# EAGLE board power_v1 (EAGLE 7.4.0)
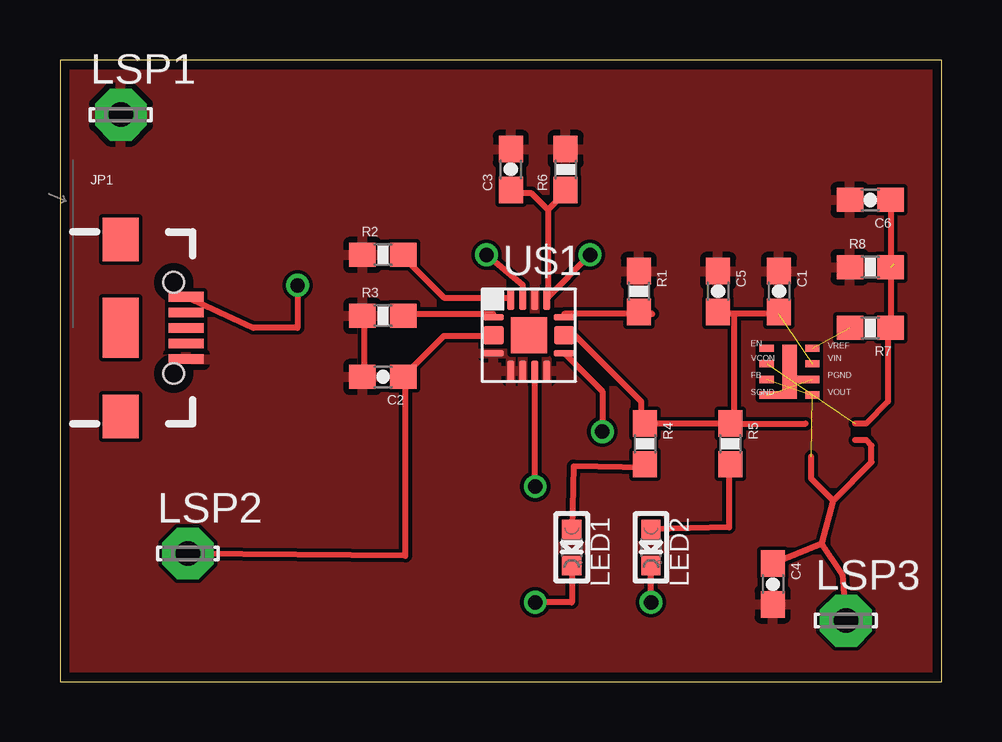
[diagram p0: board, top side]
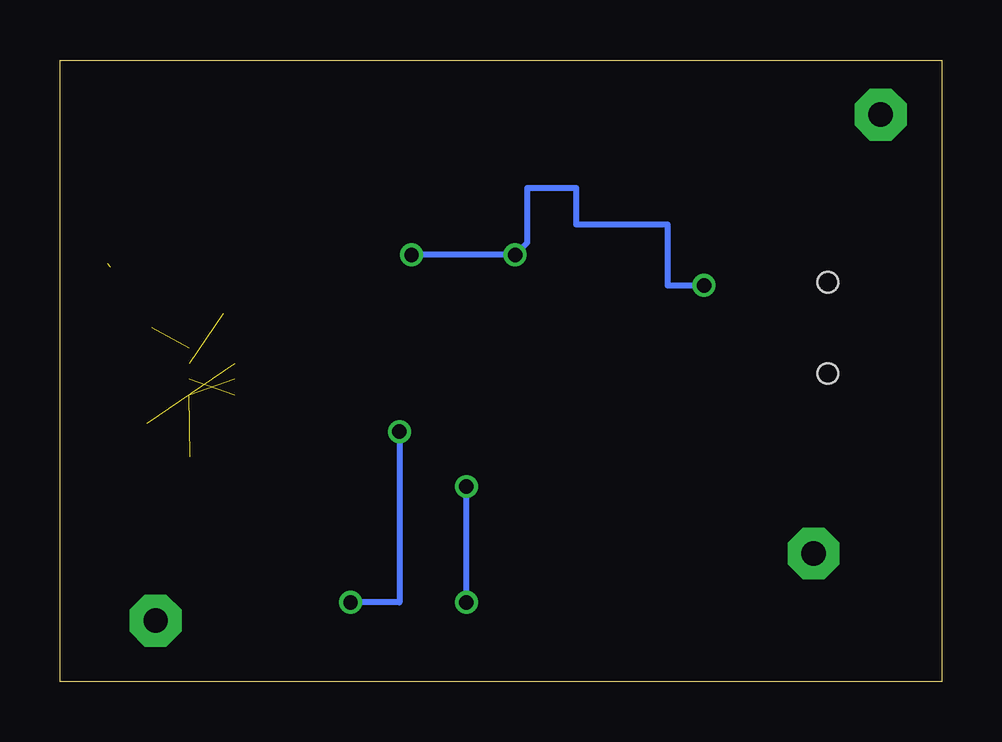
[diagram p1: board, bottom side, seen from below]

Size 36.75 x 25.9 mm. Coordinates in mm from the lower left corner, seen from the top.
Outline: 0,0 36.75,0 36.75,25.9 0,25.9 0,0
Copper layers (1*16): Top 0.0356mm / dielectric 1.5011mm / Bottom 0.0356mm
Design rules "oshpark-2layer": minimum track width 6mil, minimum drill 13mil, track to track 6mil, track to pad 6mil, pad to pad 6mil, via to via 6mil, smd to smd 6mil, copper to edge 15mil, drill to drill 6mil, minimum pad ring 7mil, minimum via ring 7mil, stop-mask expansion 4mil, vias tented up to drill 0mil, thermal gap 10mil

## Footprints (pad centres in the part's own frame; a part is rotated, then mirrored left to right if it is on the bottom)
0603-CAP = smd 1.1 x 1: 1 -0.85,0; 2 0.85,0
USB-B-MICRO-SMD_V03 = smd 1.45 x 0.4: D+1 2.725,0; D-1 2.725,0.65; GND1 2.725,-1.3; ID1 2.725,-0.65; VBUS1 2.725,1.3 | smd 1.5 x 1.8: SHIELD1 0,3.685; SHIELD2 0,-3.685 | smd 1.5 x 2.5: SHIELD3 0,0 | hole 0.85: 2.2,1.9; 2.2,-1.9
CHIPLED_0603 = smd 0.8 x 0.8: A 0,-0.75; C 0,0.75
LSP10 = drill 1.016 pad 2.159 octagon: MP 0,0
0603-RES = smd 1.1 x 1: 1 -0.85,0; 2 0.85,0
S-PVQFN-N16 = smd 0.85 x 0.28: 1 -0.725,2.225; 4 -0.725,0.725; 9 2.225,0.725; 12 2.225,2.225 | smd 0.85 x 0.78: 2 -0.725,1.475; 10 2.225,1.475 | smd 0.28 x 0.85: 5 0,0; 6 0.5,0; 7 1,0; 8 1.5,0; 13 1.5,2.95; 14 1,2.95; 15 0.5,2.95; 16 0,2.95 | smd 1.5 x 1.5: TH 0.75,1.475
LMZ10500 = smd 0.6 x 0.3: EN 0,1.95; FB 0,0.65; PGND 1.9,0.65; PGND1 1.45,0.65; SGND 0,0; SGND1 0.5,0; VCON 0,1.3; VIN 1.9,1.3; VOUT 1.9,0; VREF 1.9,1.95 | smd 0.6 x 2.25: EN1 0.95,0.975

## Placement (x,y rotation side)
C1  4.7uF  [0603-CAP]  29.97,16.26 270 top
C2  4.7uF  [0603-CAP]  13.46,12.7 180 top
C3  1uF  [0603-CAP]  18.8,21.34 90 top
C4  10uF  [0603-CAP]  29.72,4.06 270 top
C5  10uF  [0603-CAP]  27.43,16.26 270 top
C6  470pF  [0603-CAP]  33.78,20.07 180 top
JP1  [USB-B-MICRO-SMD_V03]  2.54,14.73 0 top
LED1  [CHIPLED_0603]  21.34,5.59 180 top
LED2  [CHIPLED_0603]  24.64,5.59 180 top
LSP1  LSP10  [LSP10]  2.54,23.62 0 top
LSP2  LSP10  [LSP10]  5.33,5.33 0 top
LSP3  LSP10  [LSP10]  32.77,2.54 0 top
R1  1.18k  [0603-RES]  24.13,16.26 270 top
R2  1.13k  [0603-RES]  13.46,17.78 0 top
R3  10k  [0603-RES]  13.46,15.24 0 top
R4  1k  [0603-RES]  24.38,9.91 270 top
R5  1k  [0603-RES]  27.94,9.91 270 top
R6  10k  [0603-RES]  21.08,21.34 90 top
R7  118k  [0603-RES]  33.78,14.73 180 top
R8  150k  [0603-RES]  33.78,17.27 0 top
U$1  BQ24072  [S-PVQFN-N16]  18.8,12.95 0 top
U$2  LMZ10500  [LMZ10500]  29.46,11.94 0 top

## Library data of the parts
C1-C6 = SparkFun-Capacitors
JP1 = SparkFun-Connectors; PROD_ID: CONN-11752
LED1 LED2 = microbuilder
LSP1-LSP3 = solpad
R1-R6 = SparkFun-Resistors
R7 R8 = SparkFun-Passives
U$1 = Simplex-ICs
U$2 = LMZ10500

## Nets
BAT: C2.1 LSP2.MP U$1.2
GND: U$2.PGND U$2.SGND
N$1: R7.2 U$2.VREF
N$2: C6.1 R7.1 R8.2 U$2.VCON
N$3: R1.2 U$1.12
N$5: R2.2 U$1.16
N$6: R3.2 U$1.1
N$8: C1.1 C2.2 C3.2 C4.2 C5.1 C6.2 JP1.GND1 LSP1.MP R1.1 R2.1 R3.1 R6.2 R8.1 U$1.4 U$1.5 U$1.6 U$1.8 U$1.14
N$9: C1.2 C5.2 R4.1 R5.1 U$1.10 U$2.VIN
N$10: LED1.A R4.2
N$11: LED2.A R5.2
N$12: LED2.C U$1.9
N$13: LED1.C U$1.7
N$14: C3.1 JP1.VBUS1 R6.1 U$1.13 U$1.15
VOUT: C4.1 LSP3.MP U$2.FB U$2.VOUT

## Tracks (layer width: path | path; a pad name or v marks a point on that pad's centre or on a via)
BAT
  Top 0.254: U$1.2 18.06,14.4 16,14.4 14.4,12.8 C2.1 14.4,12.57 14.4,5.23 LSP2.MP
GND  (1 unrouted)
N$1  (1 unrouted)
N$2  (2 unrouted)
  Top 0.254: 33.15,10.74 33.6,10.74 34.52,11.66 34.52,14.63 R7.1 R8.2 C6.1 | 34.77,17.4 34.77,17.63
N$3
  Top 0.254: U$1.12 21.03,15.32 24.69,15.32 R1.2
N$4
  Top 0.254: 19.3,16 19.3,16.26
N$5
  Top 0.254: U$1.16 18.75,16 16,16 14.4,17.6 R2.2
N$6
  Top 0.254: U$1.1 18.06,15.32 14.4,15.32 R3.2
N$8
  pour Top: -2.29,27.69 -2.29,-1.52 37.59,-1.78 37.59,27.43
N$9  (1 unrouted)
  Top 0.254: U$1.10 21.03,14.4 21.49,14.4 24.23,11.66 24.23,10.97 R4.1 24.46,10.74 27.89,10.74 R5.1 | 28.12,15.32 29.95,15.32 C1.2 | 28.12,15.32 27.43,15.32 C5.2 | 31.09,10.74 28.12,10.74 R5.1 | 28.12,15.32 28.12,10.97 R5.1
N$10
  Top 0.254: LED1.A 21.41,8.97 24.46,8.91 R4.2
N$11
  Top 0.254: LED2.A 27.89,6.43 27.89,8.91 R5.2
N$12  (via drill 0.6)
  Top 0.254: U$1.9 22.61,12.09 v22.61,10.41 | v24.64,3.3 LED2.C
  Bottom 0.254: v22.61,10.41 22.61,3.3 v24.64,3.3
N$13  (via drill 0.6)
  Top 0.254: LED1.C 21.34,3.3 v19.81,3.3 | v19.81,8.13 19.8,8.14 U$1.7
  Bottom 0.254: v19.81,3.3 v19.81,8.13
N$14  (via drill 0.6)
  Top 0.254: 20.34,19.66 20.34,16 U$1.13 20.3,15.98 v22.1,17.78 | 20.34,19.66 21.03,20.34 R6.1 | 20.34,19.66 19.66,20.34 18.97,20.34 C3.1 | U$1.15 19.3,16.52 v17.78,17.78 | v9.91,16.51 9.91,14.73 8.06,14.73 JP1.VBUS1
  Bottom 0.254: v22.1,17.78 v17.78,17.78 17.27,18.29 17.27,20.57 15.24,20.57 15.24,19.05 11.43,19.05 11.43,16.51 v9.91,16.51
N$15  (via drill 0.6)
  other vias: 22.61,10.41
N$16  (via drill 0.6)
  other vias: 22.1,17.78
N$17  (via drill 0.6)
  other vias: 17.78,17.78
N$18  (via drill 0.6)
  other vias: 9.91,16.51
N$19
  Top 0.254: 12.7,12.7 12.7,15.24
N$20  (via drill 0.6)
  other vias: 19.81,8.13
N$21  (via drill 0.6)
  other vias: 19.81,3.3
VOUT  (2 unrouted)
  Top 0.254: 31.32,9.37 31.32,8.46 32.23,7.54 | 31.75,5.74 32.23,7.54 | 33.15,10.06 33.6,10.06 33.83,9.83 33.83,9.14 32.23,7.54 | 31.75,5.74 32.61,4.47 LSP3.MP | 31.75,5.74 C4.1